# EAGLE board Lipo-Charger-12V-setup copy (EAGLE 8.1.0)
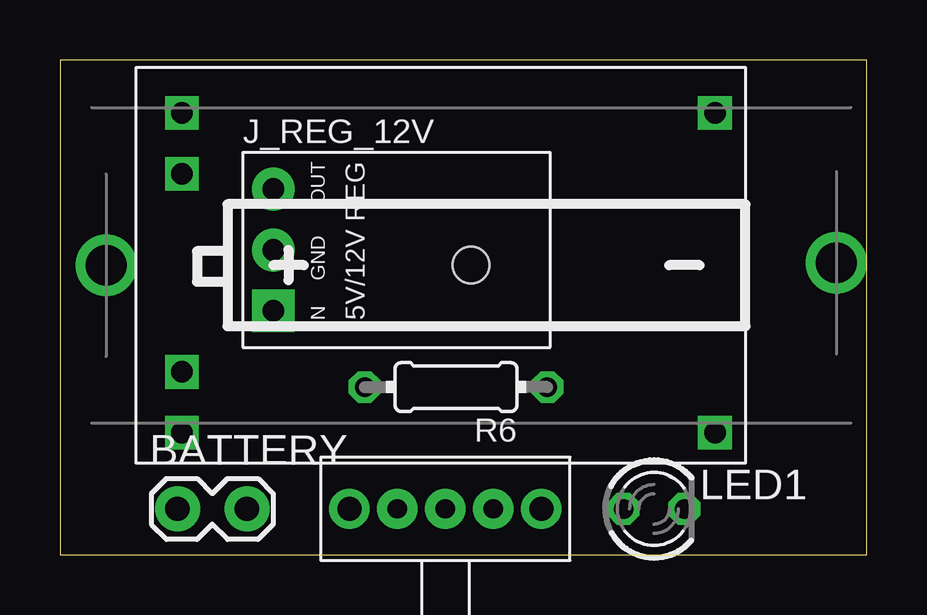
[diagram p0: board, top side]
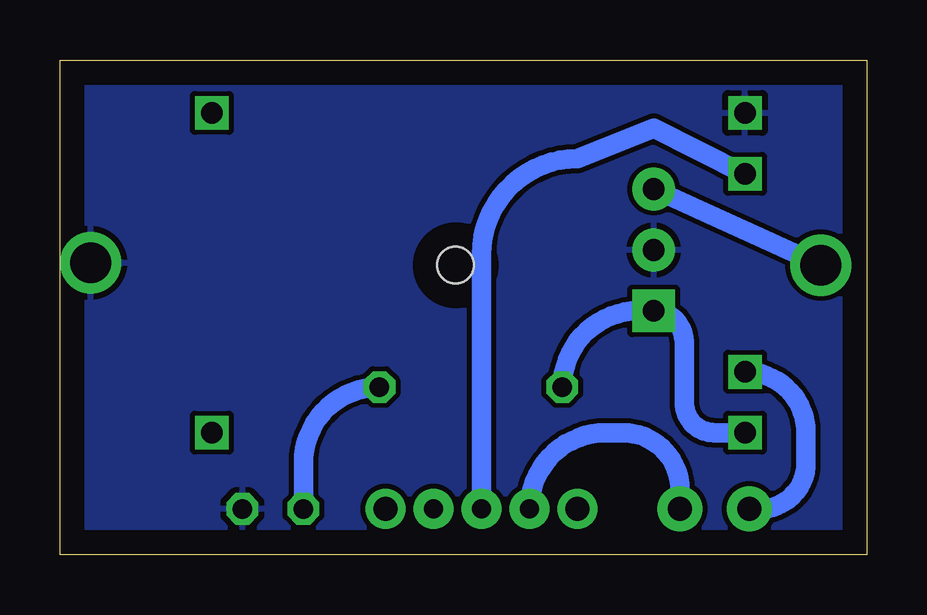
[diagram p1: board, bottom side, seen from below]

Size 33.63 x 20.62 mm. Coordinates in mm from the lower left corner, seen from the top.
Outline: 0,0 33.63,0 33.63,20.62 0,20.62 0,0
Copper layers (1*16): Top 0.035mm / dielectric 1.5mm / Bottom 0.035mm
Design rules "default": minimum track width 10mil, minimum drill 24mil, track to track 8mil, track to pad 8mil, pad to pad 8mil, via to via 8mil, smd to smd 8mil, copper to edge 40mil, drill to drill 8mil, minimum pad ring 10mil, minimum via ring 8mil, stop-mask expansion 4mil, vias tented up to drill 0mil, thermal gap 10mil

## Footprints (pad centres in the part's own frame; a part is rotated, then mirrored left to right if it is on the bottom)
BATTERY-A23 = drill 1.702: GND@1 15.22,0.1; PWR@1 -15.22,0 | hole 1.524: 0,0
1X02_LOCK = drill 1.016 pad 1.88: 1 -0.178,0; 2 2.718,0
POLOLU_5V-12V_STEPUP_U3V12F5-U3V12F12 = drill 0.9 pad 1.778: GND 0,-6.35; VOUT -2.54,-6.35 | drill 0.9 pad 1.778 square: VIN 2.54,-6.35
LED3MM = drill 0.813 octagon: A -1.27,0; K 1.27,0
SWITCH_SPDT-TE-CONNECT = drill 0.8 pad 1.676: 1 2,0; 2 4,0; 3 6,0 | drill 1 pad 1.676: MOUNT1 0,0; MOUNT2 8,0
0204/7 = drill 0.813 octagon: 1 -3.81,0; 2 3.81,0
TP4056-LITHIUM-PROTECTED-MODULE = drill 0.9 square: B+ 10.795,4.445; B- 10.795,-3.81; IN+ -11.43,6.985; IN- -11.43,-6.35; OUT+ 10.795,6.985; OUT- 10.795,-6.35

## Placement (x,y rotation side)
BAT1  [BATTERY-A23]  17.14,12.06 0 top
BATTERY  [1X02_LOCK]  5.08,1.91 0 top
J_REG_12V  POLOLU_VOLTAGE_REGULATORS_3PIN  [POLOLU_5V-12V_STEPUP_U3V12F5-U3V12F12]  15.24,12.7 270 top
LED1  [LED3MM]  24.77,1.91 0 top
POWER  SPDT  [SWITCH_SPDT-TE-CONNECT]  12.06,1.91 0 top
R6  390  [0204/7]  16.51,6.99 180 top
USB-LIPO-CHARGER  TP4056-MODULE  [TP4056-LITHIUM-PROTECTED-MODULE]  15.88,12.06 180 top

## Library data of the parts
BAT1 = Daniel
BATTERY J_REG_12V POWER R6 USB-LIPO-CHARGER = CMU-ArtFab
LED1 = led

## Nets
+12V: BAT1.PWR@1 J_REG_12V.VOUT
GND: BAT1.GND@1 J_REG_12V.GND LED1.K USB-LIPO-CHARGER.OUT-
IN+: USB-LIPO-CHARGER.IN+
IN-: USB-LIPO-CHARGER.IN-
N$1: BATTERY.2 POWER.1
N$2: LED1.A R6.1
N$18: BATTERY.1 USB-LIPO-CHARGER.B+
N$19: POWER.2 USB-LIPO-CHARGER.B-
VIN: J_REG_12V.VIN R6.2 USB-LIPO-CHARGER.OUT+

## Tracks (layer width: path | path; a pad name or v marks a point on that pad's centre or on a via)
+12V
  Bottom 0.813: J_REG_12V.VOUT BAT1.PWR@1
GND
  pour Bottom: 0,0 0,19.68 33.66,19.68 33.66,0
N$1
  Bottom 0.813: BATTERY.2 7.8,2.72 arc-90 10.16,5.08 10.89,5.08 arc-90 POWER.1
N$2
  Bottom 0.813: R6.1 arc-90 23.5,3.81 LED1.A
N$18
  Bottom 0.813: BATTERY.1 4.45,1.91 arc-90 2.54,3.81 2.54,5.08 arc-90 USB-LIPO-CHARGER.B+
N$19
  Bottom 0.813: USB-LIPO-CHARGER.B- 8.89,17.78 12.06,16.51 arc-90 16.07,12.51 POWER.2
VIN
  Bottom 0.813: USB-LIPO-CHARGER.OUT+ 6.35,5.08 arc90 7.62,6.35 7.62,8.89 arc-90 J_REG_12V.VIN 9.53,10.16 arc-90 R6.2